# Altium PCB relay.PcbDoc (part 3 of 4)
Units mil, origin at the board's own origin, x right, y up, seen from the top; angles counter-clockwise.
Board outline 5718.69 x 3947.04 mil, 2 copper layers (Top Layer, Bottom Layer); 122 components, 108 nets, 435 pads, 81 vias.
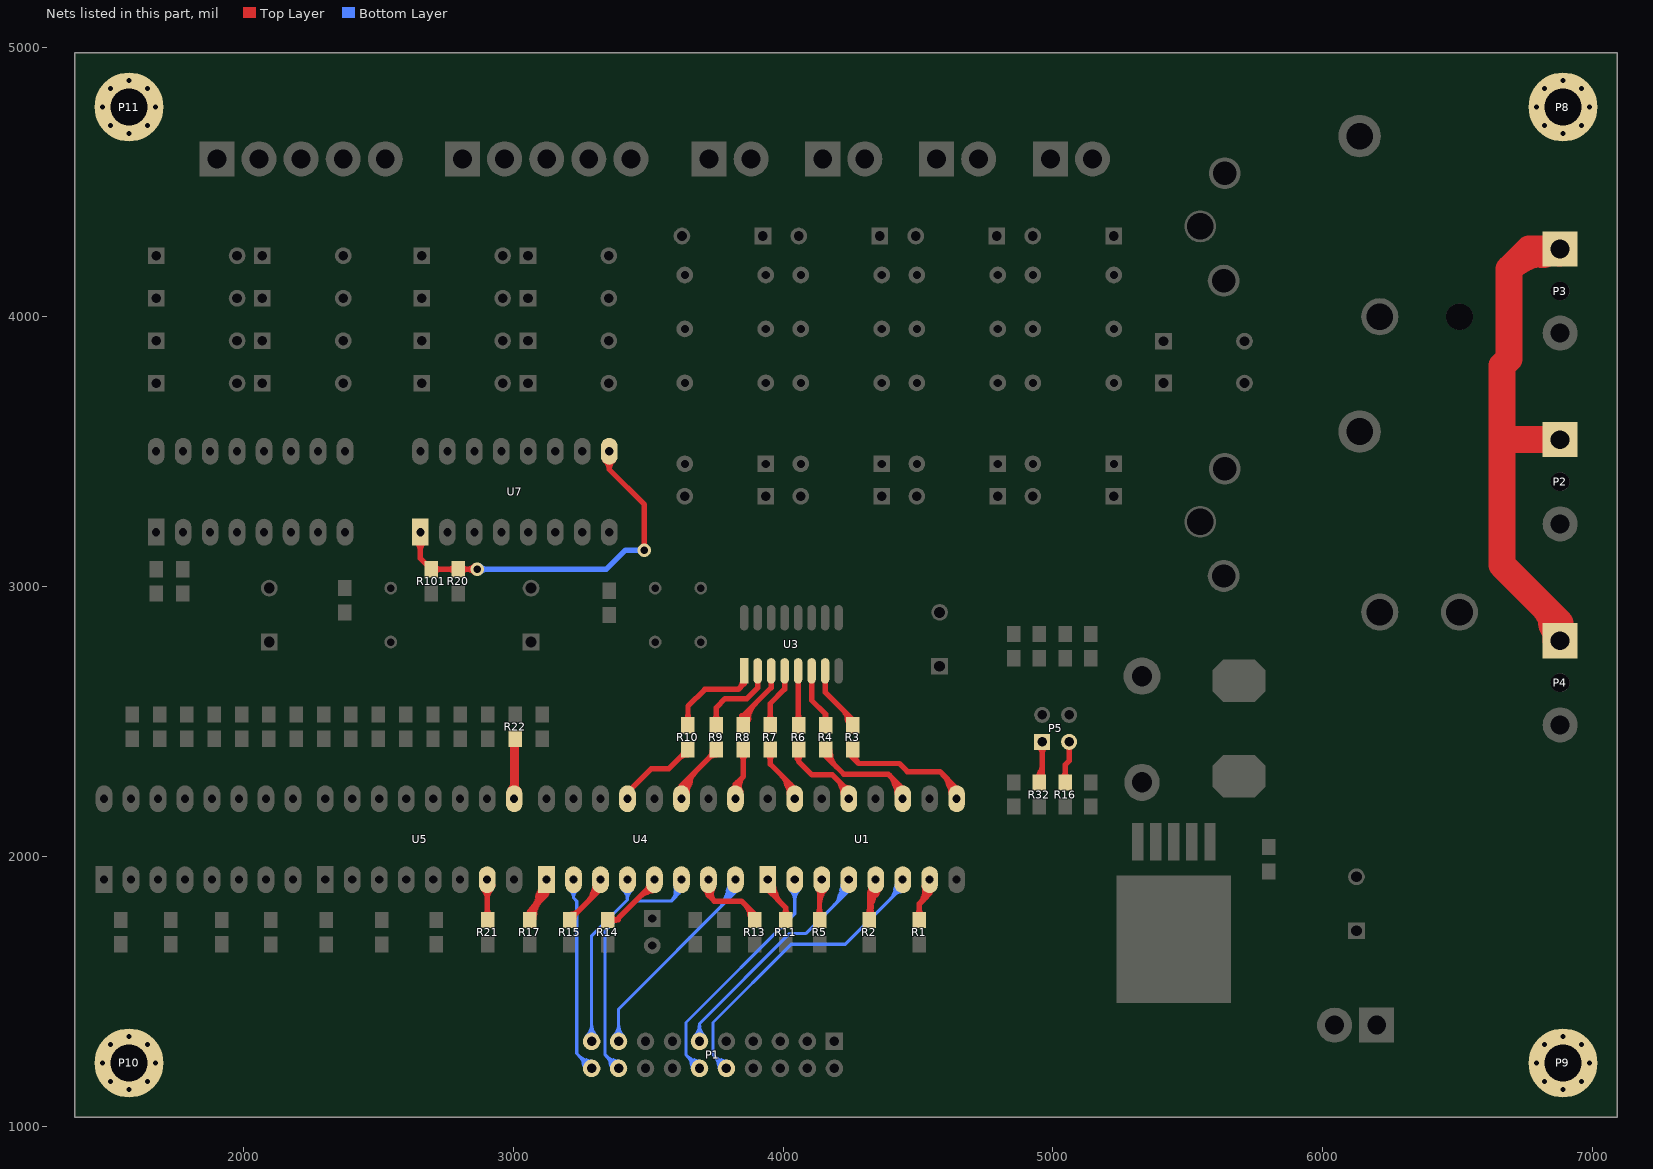
[diagram p3: the nets of this part, all layers, seen from the top]

## Via types
v1: diameter 50, hole 28, Top Layer to Bottom Layer, 42 vias
v2: diameter 50, hole 30, Top Layer to Bottom Layer, 36 vias
v3: diameter 80, hole 50, Top Layer to Bottom Layer, 2 vias
v4: diameter 100, hole 60, Top Layer to Bottom Layer, 1 vias

## Nets (pads, with @x,y where several pads share a name; then routed paths per layer and width w, separated by ;. In a path a pad name is that pad's centre, name@x,y a point inside that pad or via, vN(x,y) a via of type N, cw(c..) or ccw(c..) an arc to the next point about the centre after c; other vN are vias at no path point) (continued)
NetP1_10: P1.10 U1.6 | length 2849.5
  Bottom Layer w12: P1.10@3790,1215 3740,1265 3740,1385 4030,1675 4230,1675 4443.07,1888.07 U1.6@4443.07,1914.29 ; 3744.76,1260.24 ccw(c3790,1305.48) P1.10@3790,1241.5 ; 3744.76,1260.24 cw(c3699.52,1215) P1.10@3763.5,1215 ; 3744.76,1260.24 ccw(c3790,1305.48) P1.10@3790,1241.5 ; 3744.76,1260.24 cw(c3699.52,1215) P1.10@3763.5,1215 ; 3744.76,1260.24 ccw(c3790,1305.48) P1.10@3790,1241.5 ; 3744.76,1260.24 cw(c3699.52,1215) P1.10@3763.5,1215 ; 3752.71,1251.49 cw(c3740.19,1204.8) P1.10@3787.55,1214.5 ; 3752.71,1251.49 cw(c3740.19,1204.8) P1.10@3787.55,1214.5 ; 3752.71,1251.49 cw(c3740.19,1204.8) P1.10@3787.55,1214.5 ; 3753.51,1252.29 ccw(c3800.2,1264.81) P1.10@3790.5,1217.45 ; 3753.51,1252.29 ccw(c3800.2,1264.81) P1.10@3790.5,1217.45 ; 3753.51,1252.29 ccw(c3800.2,1264.81) P1.10@3790.5,1217.45 ; 3758.53,1233.54 ccw(c3795.84,1243.53) P1.10@3788.09,1205.69 ; 3758.53,1233.54 ccw(c3795.84,1243.53) P1.10@3788.09,1205.69 ; 3758.53,1233.54 ccw(c3795.84,1243.53) P1.10@3788.09,1205.69 ; 3765.25,1239.75 ccw(c3790,1264.51) P1.10@3790,1229.5 ; 3765.25,1239.75 cw(c3740.49,1215) P1.10@3775.5,1215 ; 3765.25,1239.75 ccw(c3790,1264.51) P1.10@3790,1229.5 ; 3765.25,1239.75 cw(c3740.49,1215) P1.10@3775.5,1215 ; 3765.25,1239.75 ccw(c3790,1264.51) P1.10@3790,1229.5 ; 3765.25,1239.75 cw(c3740.49,1215) P1.10@3775.5,1215 ; 3771.46,1246.47 cw(c3761.47,1209.16) P1.10@3799.31,1216.91 ; 3771.46,1246.47 cw(c3761.47,1209.16) P1.10@3799.31,1216.91 ; 3771.46,1246.47 cw(c3761.47,1209.16) P1.10@3799.31,1216.91 ; 4395.29,1840.29 ccw(c4340.28,1895.29) U1.6@4418.07,1895.29 ; 4395.29,1840.29 ccw(c4340.28,1895.29) U1.6@4418.07,1895.29 ; 4395.29,1840.29 ccw(c4340.28,1895.29) U1.6@4418.07,1895.29 ; 4408.02,1857.77 cw(c4458.63,1844.21) U1.6@4443.36,1894.33 ; 4408.02,1857.77 cw(c4458.63,1844.21) U1.6@4443.36,1894.33 ; 4408.02,1857.77 cw(c4458.63,1844.21) U1.6@4443.36,1894.33 ; 4412.72,1857.72 cw(c4443.07,1827.37) U1.6@4443.07,1870.29 ; 4412.72,1857.72 cw(c4443.07,1827.37) U1.6@4443.07,1870.29 ; 4412.72,1857.72 cw(c4443.07,1827.37) U1.6@4443.07,1870.29 ; 4413.61,1878.66 cw(c4451.21,1868.58) U1.6@4439.87,1905.81 ; 4413.61,1878.66 cw(c4451.21,1868.58) U1.6@4439.87,1905.81 ; 4413.61,1878.66 cw(c4451.21,1868.58) U1.6@4439.87,1905.81 ; 4415.77,1860.77 ccw(c4381.25,1895.29) U1.6@4430.07,1895.29 ; 4415.77,1860.77 ccw(c4381.25,1895.29) U1.6@4430.07,1895.29 ; 4415.77,1860.77 ccw(c4381.25,1895.29) U1.6@4430.07,1895.29
NetP1_11: P1.11 U1.4 | length 2411.1
  Bottom Layer w12: P1.11@3690,1315 3690,1380 4025,1715 4085,1715 4243.07,1873.07 U1.4@4243.07,1914.29 ; P1.11@3671.26,1333.74 ccw(c3626.02,1378.98) 3690,1378.98 ; P1.11@3671.26,1333.74 ccw(c3626.02,1378.98) 3690,1378.98 ; P1.11@3671.26,1333.74 ccw(c3626.02,1378.98) 3690,1378.98 ; P1.11@3679.75,1325.25 ccw(c3654.99,1350.01) 3690,1350.01 ; P1.11@3679.75,1325.25 ccw(c3654.99,1350.01) 3690,1350.01 ; P1.11@3679.75,1325.25 ccw(c3654.99,1350.01) 3690,1350.01 ; 3690,1350.01 ccw(c3725.01,1350.01) P1.11@3700.25,1325.25 ; 3690,1350.01 ccw(c3725.01,1350.01) P1.11@3700.25,1325.25 ; 3690,1350.01 ccw(c3725.01,1350.01) P1.11@3700.25,1325.25 ; 3690,1378.98 ccw(c3753.98,1378.98) P1.11@3708.74,1333.74 ; 3690,1378.98 ccw(c3753.98,1378.98) P1.11@3708.74,1333.74 ; 3690,1378.98 ccw(c3753.98,1378.98) P1.11@3708.74,1333.74 ; 4184.68,1814.68 ccw(c4104.07,1895.29) U1.4@4218.07,1895.29 ; 4184.68,1814.68 ccw(c4104.07,1895.29) U1.4@4218.07,1895.29 ; 4184.68,1814.68 ccw(c4104.07,1895.29) U1.4@4218.07,1895.29 ; 4205.17,1835.17 ccw(c4145.04,1895.29) U1.4@4230.07,1895.29 ; 4205.17,1835.17 ccw(c4145.04,1895.29) U1.4@4230.07,1895.29 ; 4205.17,1835.17 ccw(c4145.04,1895.29) U1.4@4230.07,1895.29 ; 4205.54,1848.51 cw(c4274.61,1830) U1.4@4243.51,1894.39 ; 4205.54,1848.51 cw(c4274.61,1830) U1.4@4243.51,1894.39 ; 4205.54,1848.51 cw(c4274.61,1830) U1.4@4243.51,1894.39 ; 4212.32,1873.81 cw(c4259.56,1861.16) U1.4@4238.29,1905.2 ; 4212.32,1873.81 cw(c4259.56,1861.16) U1.4@4238.29,1905.2 ; 4212.32,1873.81 cw(c4259.56,1861.16) U1.4@4238.29,1905.2 ; 4218.77,1853.11 cw(c4260.37,1841.96) U1.4@4247.08,1882.93 ; 4218.77,1853.11 cw(c4260.37,1841.96) U1.4@4247.08,1882.93 ; 4218.77,1853.11 cw(c4260.37,1841.96) U1.4@4247.08,1882.93 ; U1.4@4221.42,1882.79 cw(c4206.28,1874.05) 4223.17,1869.52 ; U1.4@4221.42,1882.79 cw(c4206.28,1874.05) 4223.17,1869.52 ; U1.4@4221.42,1882.79 cw(c4206.28,1874.05) 4223.17,1869.52 ; 4225.65,1855.65 ccw(c4186.01,1895.29) U1.4@4242.07,1895.29 ; 4225.65,1855.65 ccw(c4186.01,1895.29) U1.4@4242.07,1895.29 ; 4225.65,1855.65 ccw(c4186.01,1895.29) U1.4@4242.07,1895.29
NetP1_12: P1.12 U1.2 | length 2363.4
  Bottom Layer w12: P1.12@3690,1215 3640,1265 3640,1385 4043.07,1788.07 U1.2@4043.07,1914.29 ; 3644.76,1260.24 ccw(c3690,1305.48) P1.12@3690,1241.5 ; 3644.76,1260.24 cw(c3599.52,1215) P1.12@3663.5,1215 ; 3644.76,1260.24 ccw(c3690,1305.48) P1.12@3690,1241.5 ; 3644.76,1260.24 cw(c3599.52,1215) P1.12@3663.5,1215 ; 3644.76,1260.24 ccw(c3690,1305.48) P1.12@3690,1241.5 ; 3644.76,1260.24 cw(c3599.52,1215) P1.12@3663.5,1215 ; 3652.71,1251.49 cw(c3640.19,1204.8) P1.12@3687.55,1214.5 ; 3652.71,1251.49 cw(c3640.19,1204.8) P1.12@3687.55,1214.5 ; 3652.71,1251.49 cw(c3640.19,1204.8) P1.12@3687.55,1214.5 ; 3653.51,1252.29 ccw(c3700.2,1264.81) P1.12@3690.5,1217.45 ; 3653.51,1252.29 ccw(c3700.2,1264.81) P1.12@3690.5,1217.45 ; 3653.51,1252.29 ccw(c3700.2,1264.81) P1.12@3690.5,1217.45 ; 3658.53,1233.54 ccw(c3695.84,1243.53) P1.12@3688.09,1205.69 ; 3658.53,1233.54 ccw(c3695.84,1243.53) P1.12@3688.09,1205.69 ; 3658.53,1233.54 ccw(c3695.84,1243.53) P1.12@3688.09,1205.69 ; 3665.25,1239.75 ccw(c3690,1264.51) P1.12@3690,1229.5 ; 3665.25,1239.75 cw(c3640.49,1215) P1.12@3675.5,1215 ; 3665.25,1239.75 ccw(c3690,1264.51) P1.12@3690,1229.5 ; 3665.25,1239.75 cw(c3640.49,1215) P1.12@3675.5,1215 ; 3665.25,1239.75 ccw(c3690,1264.51) P1.12@3690,1229.5 ; 3665.25,1239.75 cw(c3640.49,1215) P1.12@3675.5,1215 ; 3671.46,1246.47 cw(c3661.47,1209.16) P1.12@3699.31,1216.91 ; 3671.46,1246.47 cw(c3661.47,1209.16) P1.12@3699.31,1216.91 ; 3671.46,1246.47 cw(c3661.47,1209.16) P1.12@3699.31,1216.91 ; U1.2@4025.39,1877.61 cw(c3982.72,1834.94) 4043.07,1834.94 ; U1.2@4025.39,1877.61 cw(c3982.72,1834.94) 4043.07,1834.94 ; U1.2@4025.39,1877.61 cw(c3982.72,1834.94) 4043.07,1834.94 ; U1.2@4033.88,1886.1 cw(c4011.69,1863.91) 4043.07,1863.91 ; U1.2@4033.88,1886.1 cw(c4011.69,1863.91) 4043.07,1863.91 ; U1.2@4033.88,1886.1 cw(c4011.69,1863.91) 4043.07,1863.91 ; 4043.07,1834.94 cw(c4103.43,1834.94) U1.2@4060.75,1877.61 ; 4043.07,1834.94 cw(c4103.43,1834.94) U1.2@4060.75,1877.61 ; 4043.07,1834.94 cw(c4103.43,1834.94) U1.2@4060.75,1877.61 ; 4043.07,1863.91 cw(c4074.46,1863.91) U1.2@4052.26,1886.1 ; 4043.07,1863.91 cw(c4074.46,1863.91) U1.2@4052.26,1886.1 ; 4043.07,1863.91 cw(c4074.46,1863.91) U1.2@4052.26,1886.1
NetP1_17: P1.17 U4.8 | length 2544.6
  Bottom Layer w12: P1.17@3390,1315 3390,1435 3823.07,1868.07 U4.8@3823.07,1914.29 ; P1.17@3371.26,1333.74 ccw(c3326.02,1378.98) 3390,1378.98 ; P1.17@3371.26,1333.74 ccw(c3326.02,1378.98) 3390,1378.98 ; P1.17@3371.26,1333.74 ccw(c3326.02,1378.98) 3390,1378.98 ; P1.17@3379.75,1325.25 ccw(c3354.99,1350.01) 3390,1350.01 ; P1.17@3379.75,1325.25 ccw(c3354.99,1350.01) 3390,1350.01 ; P1.17@3379.75,1325.25 ccw(c3354.99,1350.01) 3390,1350.01 ; 3390,1350.01 ccw(c3425.01,1350.01) P1.17@3400.25,1325.25 ; 3390,1350.01 ccw(c3425.01,1350.01) P1.17@3400.25,1325.25 ; 3390,1350.01 ccw(c3425.01,1350.01) P1.17@3400.25,1325.25 ; 3390,1378.98 ccw(c3453.98,1378.98) P1.17@3408.74,1333.74 ; 3390,1378.98 ccw(c3453.98,1378.98) P1.17@3408.74,1333.74 ; 3390,1378.98 ccw(c3453.98,1378.98) P1.17@3408.74,1333.74 ; 3761.15,1806.15 ccw(c3672,1895.29) U4.8@3798.07,1895.29 ; 3761.15,1806.15 ccw(c3672,1895.29) U4.8@3798.07,1895.29 ; 3761.15,1806.15 ccw(c3672,1895.29) U4.8@3798.07,1895.29 ; 3781.63,1826.63 ccw(c3712.97,1895.29) U4.8@3810.07,1895.29 ; 3781.63,1826.63 ccw(c3712.97,1895.29) U4.8@3810.07,1895.29 ; 3781.63,1826.63 ccw(c3712.97,1895.29) U4.8@3810.07,1895.29 ; 3784.71,1845.42 cw(c3860.72,1825.05) U4.8@3823.54,1894.41 ; 3784.71,1845.42 cw(c3860.72,1825.05) U4.8@3823.54,1894.41 ; 3784.71,1845.42 cw(c3860.72,1825.05) U4.8@3823.54,1894.41 ; 3791.88,1872.2 cw(c3842.75,1858.57) U4.8@3817.87,1904.99 ; 3791.88,1872.2 cw(c3842.75,1858.57) U4.8@3817.87,1904.99 ; 3791.88,1872.2 cw(c3842.75,1858.57) U4.8@3817.87,1904.99 ; 3797.67,1849 cw(c3847.17,1835.73) U4.8@3827.95,1883.24 ; 3797.67,1849 cw(c3847.17,1835.73) U4.8@3827.95,1883.24 ; 3797.67,1849 cw(c3847.17,1835.73) U4.8@3827.95,1883.24 ; U4.8@3801.42,1882.79 cw(c3786.28,1874.05) 3803.17,1869.52 ; U4.8@3801.42,1882.79 cw(c3786.28,1874.05) 3803.17,1869.52 ; U4.8@3801.42,1882.79 cw(c3786.28,1874.05) 3803.17,1869.52 ; 3802.12,1847.12 ccw(c3753.94,1895.29) U4.8@3822.07,1895.29 ; 3802.12,1847.12 ccw(c3753.94,1895.29) U4.8@3822.07,1895.29 ; 3802.12,1847.12 ccw(c3753.94,1895.29) U4.8@3822.07,1895.29 ; U4.8@3807.25,1875.94 cw(c3797.25,1863.7) 3812.51,1859.61 ; U4.8@3807.25,1875.94 cw(c3797.25,1863.7) 3812.51,1859.61 ; U4.8@3807.25,1875.94 cw(c3797.25,1863.7) 3812.51,1859.61 ; 3812.51,1859.61 cw(c3826.64,1855.83) U4.8@3825.32,1870.39 ; 3812.51,1859.61 cw(c3826.64,1855.83) U4.8@3825.32,1870.39 ; 3812.51,1859.61 cw(c3826.64,1855.83) U4.8@3825.32,1870.39
NetP1_18: P1.18 U4.6 | length 2504.4
  Bottom Layer w12: P1.18@3390,1215 3340,1265 3340,1725 3450,1835 3585,1835 ; U4.6@3623.07,1914.29 3623.07,1873.07 3585,1835 ; 3344.76,1260.24 ccw(c3390,1305.48) P1.18@3390,1241.5 ; 3344.76,1260.24 cw(c3299.52,1215) P1.18@3363.5,1215 ; 3344.76,1260.24 ccw(c3390,1305.48) P1.18@3390,1241.5 ; 3344.76,1260.24 cw(c3299.52,1215) P1.18@3363.5,1215 ; 3344.76,1260.24 ccw(c3390,1305.48) P1.18@3390,1241.5 ; 3344.76,1260.24 cw(c3299.52,1215) P1.18@3363.5,1215 ; 3352.71,1251.49 cw(c3340.19,1204.8) P1.18@3387.55,1214.5 ; 3352.71,1251.49 cw(c3340.19,1204.8) P1.18@3387.55,1214.5 ; 3352.71,1251.49 cw(c3340.19,1204.8) P1.18@3387.55,1214.5 ; 3353.51,1252.29 ccw(c3400.2,1264.81) P1.18@3390.5,1217.45 ; 3353.51,1252.29 ccw(c3400.2,1264.81) P1.18@3390.5,1217.45 ; 3353.51,1252.29 ccw(c3400.2,1264.81) P1.18@3390.5,1217.45 ; 3358.53,1233.54 ccw(c3395.84,1243.53) P1.18@3388.09,1205.69 ; 3358.53,1233.54 ccw(c3395.84,1243.53) P1.18@3388.09,1205.69 ; 3358.53,1233.54 ccw(c3395.84,1243.53) P1.18@3388.09,1205.69 ; 3365.25,1239.75 ccw(c3390,1264.51) P1.18@3390,1229.5 ; 3365.25,1239.75 cw(c3340.49,1215) P1.18@3375.5,1215 ; 3365.25,1239.75 ccw(c3390,1264.51) P1.18@3390,1229.5 ; 3365.25,1239.75 cw(c3340.49,1215) P1.18@3375.5,1215 ; 3365.25,1239.75 ccw(c3390,1264.51) P1.18@3390,1229.5 ; 3365.25,1239.75 cw(c3340.49,1215) P1.18@3375.5,1215 ; 3371.46,1246.47 cw(c3361.47,1209.16) P1.18@3399.31,1216.91 ; 3371.46,1246.47 cw(c3361.47,1209.16) P1.18@3399.31,1216.91 ; 3371.46,1246.47 cw(c3361.47,1209.16) P1.18@3399.31,1216.91 ; 3585,1835 ccw(c3546.28,1873.72) U4.6@3599,1888.53 ; 3585,1835 ccw(c3546.28,1873.72) U4.6@3599,1888.53 ; 3585,1835 ccw(c3546.28,1873.72) U4.6@3599,1888.53 ; 3599.31,1863.26 cw(c3655.19,1863.93) U4.6@3615.2,1902.98 ; 3599.31,1863.26 cw(c3655.19,1863.93) U4.6@3615.2,1902.98 ; 3599.31,1863.26 cw(c3655.19,1863.93) U4.6@3615.2,1902.98 ; 3599.5,1849.5 ccw(c3568.91,1880.08) U4.6@3610.56,1891.78 ; 3599.5,1849.5 ccw(c3568.91,1880.08) U4.6@3610.56,1891.78 ; 3599.5,1849.5 ccw(c3568.91,1880.08) U4.6@3610.56,1891.78 ; 3613.99,1863.99 ccw(c3591.55,1886.44) U4.6@3622.11,1895.02 ; 3613.99,1863.99 ccw(c3591.55,1886.44) U4.6@3622.11,1895.02 ; 3613.99,1863.99 ccw(c3591.55,1886.44) U4.6@3622.11,1895.02
NetP1_19: P1.19 U4.4 | length 1374.7
  Bottom Layer w12: P1.19@3290,1315 3290,1706.11 3423.07,1839.18 ; U4.4@3423.07,1914.29 3423.07,1839.18 ; P1.19@3271.26,1333.74 ccw(c3226.02,1378.98) 3290,1378.98 ; P1.19@3271.26,1333.74 ccw(c3226.02,1378.98) 3290,1378.98 ; P1.19@3271.26,1333.74 ccw(c3226.02,1378.98) 3290,1378.98 ; P1.19@3279.75,1325.25 ccw(c3254.99,1350.01) 3290,1350.01 ; P1.19@3279.75,1325.25 ccw(c3254.99,1350.01) 3290,1350.01 ; P1.19@3279.75,1325.25 ccw(c3254.99,1350.01) 3290,1350.01 ; 3290,1350.01 ccw(c3325.01,1350.01) P1.19@3300.25,1325.25 ; 3290,1350.01 ccw(c3325.01,1350.01) P1.19@3300.25,1325.25 ; 3290,1350.01 ccw(c3325.01,1350.01) P1.19@3300.25,1325.25 ; 3290,1378.98 ccw(c3353.98,1378.98) P1.19@3308.74,1333.74 ; 3290,1378.98 ccw(c3353.98,1378.98) P1.19@3308.74,1333.74 ; 3290,1378.98 ccw(c3353.98,1378.98) P1.19@3308.74,1333.74 ; U4.4@3406.35,1876.7 cw(c3372.62,1839.19) 3423.07,1839.19 ; U4.4@3406.35,1876.7 cw(c3372.62,1839.19) 3423.07,1839.19 ; U4.4@3406.35,1876.7 cw(c3372.62,1839.19) 3423.07,1839.19 ; 3423.07,1839.19 cw(c3473.53,1839.19) U4.4@3439.79,1876.7 ; 3423.07,1839.19 cw(c3473.53,1839.19) U4.4@3439.79,1876.7 ; 3423.07,1839.19 cw(c3473.53,1839.19) U4.4@3439.79,1876.7
NetP1_20: P1.20 U4.2 | length 1967.3
  Bottom Layer w12: U4.2@3223.07,1914.29 3223.07,1846.93 ; P1.20@3290,1215 3235,1270 3235,1835 3223.07,1846.93 ; U4.2@3208.62,1874.89 cw(c3188.8,1846.93) 3223.07,1846.93 ; U4.2@3208.62,1874.89 cw(c3188.8,1846.93) 3223.07,1846.93 ; U4.2@3208.62,1874.89 cw(c3188.8,1846.93) 3223.07,1846.93 ; 3223.07,1846.93 cw(c3257.34,1846.93) U4.2@3237.53,1874.89 ; 3223.07,1846.93 cw(c3257.34,1846.93) U4.2@3237.53,1874.89 ; 3223.07,1846.93 cw(c3257.34,1846.93) U4.2@3237.53,1874.89 ; 3244.76,1260.24 ccw(c3290,1305.48) P1.20@3290,1241.5 ; 3244.76,1260.24 cw(c3199.52,1215) P1.20@3263.5,1215 ; 3244.76,1260.24 ccw(c3290,1305.48) P1.20@3290,1241.5 ; 3244.76,1260.24 cw(c3199.52,1215) P1.20@3263.5,1215 ; 3244.76,1260.24 ccw(c3290,1305.48) P1.20@3290,1241.5 ; 3244.76,1260.24 cw(c3199.52,1215) P1.20@3263.5,1215 ; 3252.71,1251.49 cw(c3240.19,1204.8) P1.20@3287.55,1214.5 ; 3252.71,1251.49 cw(c3240.19,1204.8) P1.20@3287.55,1214.5 ; 3252.71,1251.49 cw(c3240.19,1204.8) P1.20@3287.55,1214.5 ; 3253.51,1252.29 ccw(c3300.2,1264.81) P1.20@3290.5,1217.45 ; 3253.51,1252.29 ccw(c3300.2,1264.81) P1.20@3290.5,1217.45 ; 3253.51,1252.29 ccw(c3300.2,1264.81) P1.20@3290.5,1217.45 ; 3258.53,1233.54 ccw(c3295.84,1243.53) P1.20@3288.09,1205.69 ; 3258.53,1233.54 ccw(c3295.84,1243.53) P1.20@3288.09,1205.69 ; 3258.53,1233.54 ccw(c3295.84,1243.53) P1.20@3288.09,1205.69 ; 3265.25,1239.75 ccw(c3290,1264.51) P1.20@3290,1229.5 ; 3265.25,1239.75 cw(c3240.49,1215) P1.20@3275.5,1215 ; 3265.25,1239.75 ccw(c3290,1264.51) P1.20@3290,1229.5 ; 3265.25,1239.75 cw(c3240.49,1215) P1.20@3275.5,1215 ; 3265.25,1239.75 ccw(c3290,1264.51) P1.20@3290,1229.5 ; 3265.25,1239.75 cw(c3240.49,1215) P1.20@3275.5,1215 ; 3271.46,1246.47 cw(c3261.47,1209.16) P1.20@3299.31,1216.91 ; 3271.46,1246.47 cw(c3261.47,1209.16) P1.20@3299.31,1216.91 ; 3271.46,1246.47 cw(c3261.47,1209.16) P1.20@3299.31,1216.91
NetP2_1: P2.1 P3.1 P4.1 | length 3385
  Top Layer w100: P4.1@6880,2800 6880,2865 6665,3080 6665,3545 ; P2.1@6880,3545 6665,3545 ; P3.1@6880,4252 6765,4252 6690,4177 ; 6665,3545 6665,3820 6690,3845 6690,4177 ; 6690.01,4177.01 cw(c6842.33,4024.69) P3.1@6877.55,4237.2 ; 6690.01,4177.01 cw(c6842.33,4024.69) P3.1@6877.55,4237.2 ; 6690.01,4177.01 cw(c6842.33,4024.69) P3.1@6877.55,4237.2 ; 6808.43,2936.57 cw(c6671.86,2800) P4.1@6865,2800 ; 6808.43,2936.57 cw(c6671.86,2800) P4.1@6865,2800 ; 6808.43,2936.57 cw(c6671.86,2800) P4.1@6865,2800 ; 6810.56,4230.65 ccw(c6802.21,4315.92) P3.1@6868.41,4261.52 ; 6810.56,4230.65 ccw(c6802.21,4315.92) P3.1@6868.41,4261.52 ; 6810.56,4230.65 ccw(c6802.21,4315.92) P3.1@6868.41,4261.52 ; 6847.58,2865.02 ccw(c6930.34,2887.19) P4.1@6887.5,2812.99 ; 6847.58,2865.02 ccw(c6930.34,2887.19) P4.1@6887.5,2812.99 ; 6847.58,2865.02 ccw(c6930.34,2887.19) P4.1@6887.5,2812.99
NetP5_1: P5.1 R32.2 | length 618.3
  Top Layer w20: R32.2@4950,2275 4960,2285 P5.1@4960,2425 ; R32.2@4939.39,2290.61 ccw(c4889.64,2340.36) 4960,2340.36 ; R32.2@4939.39,2290.61 ccw(c4889.64,2340.36) 4960,2340.36 ; R32.2@4939.39,2290.61 ccw(c4889.64,2340.36) 4960,2340.36 ; P5.1@4946.19,2411.19 cw(c4912.86,2377.86) 4960,2377.86 ; P5.1@4946.19,2411.19 cw(c4912.86,2377.86) 4960,2377.86 ; P5.1@4946.19,2411.19 cw(c4912.86,2377.86) 4960,2377.86 ; 4953.42,2314.9 ccw(c4968.17,2306.38) R32.2@4958.51,2292.35 ; 4953.42,2314.9 ccw(c4968.17,2306.38) R32.2@4958.51,2292.35 ; 4953.42,2314.9 ccw(c4968.17,2306.38) R32.2@4958.51,2292.35 ; 4960,2377.86 cw(c5007.14,2377.86) P5.1@4973.81,2411.19 ; 4960,2377.86 cw(c5007.14,2377.86) P5.1@4973.81,2411.19 ; 4960,2377.86 cw(c5007.14,2377.86) P5.1@4973.81,2411.19
NetP5_3: P5.3 R16.2 | length 326.9
  Top Layer w20: R16.2@5045,2275 5045,2340 5060,2355 P5.3@5060,2425 ; R16.2@5034.39,2290.61 ccw(c5008.79,2316.21) 5045,2316.21 ; R16.2@5034.39,2290.61 ccw(c5008.79,2316.21) 5045,2316.21 ; R16.2@5034.39,2290.61 ccw(c5008.79,2316.21) 5045,2316.21 ; 5045,2316.21 ccw(c5081.21,2316.21) R16.2@5055.61,2290.61 ; 5045,2316.21 ccw(c5081.21,2316.21) R16.2@5055.61,2290.61 ; 5045,2316.21 ccw(c5081.21,2316.21) R16.2@5055.61,2290.61
NetP8_1: P8.1 P8.2 P8.3 P8.4 P8.5 P8.6 P8.7 P8.8 P8.9
NetP9_1: P9.1 P9.2 P9.3 P9.4 P9.5 P9.6 P9.7 P9.8 P9.9
NetP10_1: P10.1 P10.2 P10.3 P10.4 P10.5 P10.6 P10.7 P10.8 P10.9
NetP11_1: P11.1 P11.2 P11.3 P11.4 P11.5 P11.6 P11.7 P11.8 P11.9
NetR1_1: R1.1 U1.7 | length 793.2
  Top Layer w20: R1.1@4505,1765 4505,1825 ; U1.7@4543.07,1914.29 4543.07,1863.07 ; R1.1@4494.39,1780.61 ccw(c4468.79,1806.21) 4505,1806.21 ; R1.1@4494.39,1780.61 ccw(c4468.79,1806.21) 4505,1806.21 ; R1.1@4494.39,1780.61 ccw(c4468.79,1806.21) 4505,1806.21 ; 4505,1806.21 ccw(c4541.21,1806.21) R1.1@4515.61,1780.61 ; 4505,1806.21 ccw(c4541.21,1806.21) R1.1@4515.61,1780.61 ; 4505,1806.21 ccw(c4541.21,1806.21) R1.1@4515.61,1780.61 ; 4505,1825 ccw(c4456.97,1873.04) U1.7@4522.74,1890.04 ; 4505,1825 ccw(c4456.97,1873.04) U1.7@4522.74,1890.04 ; 4505,1825 ccw(c4456.97,1873.04) U1.7@4522.74,1890.04 ; 4505,1825 4543.07,1863.07 ; 4529.75,1849.75 ccw(c4496.3,1883.2) U1.7@4542.1,1895.04 ; 4529.75,1849.75 ccw(c4496.3,1883.2) U1.7@4542.1,1895.04 ; 4529.75,1849.75 ccw(c4496.3,1883.2) U1.7@4542.1,1895.04 ; U1.7@4534.59,1876.08 cw(c4528.85,1863.07) 4543.07,1863.07 ; U1.7@4534.59,1876.08 cw(c4528.85,1863.07) 4543.07,1863.07 ; U1.7@4534.59,1876.08 cw(c4528.85,1863.07) 4543.07,1863.07 ; 4543.07,1863.07 cw(c4557.29,1863.07) U1.7@4551.55,1876.08 ; 4543.07,1863.07 cw(c4557.29,1863.07) U1.7@4551.55,1876.08 ; 4543.07,1863.07 cw(c4557.29,1863.07) U1.7@4551.55,1876.08
NetR2_1: R2.1 U1.5 | length 1579.4
  Top Layer w20: R2.1@4320,1765 4320,1866.93 ; U1.5@4343.07,1914.29 4343.07,1890 4320,1866.93 ; R2.1@4309.39,1780.61 ccw(c4283.79,1806.21) 4320,1806.21 ; R2.1@4309.39,1780.61 ccw(c4283.79,1806.21) 4320,1806.21 ; R2.1@4309.39,1780.61 ccw(c4283.79,1806.21) 4320,1806.21 ; R2.1@4312.45,1782.96 ccw(c4302.52,1800.03) R2.1@4321.61,1794.98 ; R2.1@4312.45,1782.96 ccw(c4302.52,1800.03) R2.1@4321.61,1794.98 ; R2.1@4312.45,1782.96 ccw(c4302.52,1800.03) R2.1@4321.61,1794.98 ; R2.1@4320,1788.89 cw(c4449.47,1788.89) U1.5@4357.92,1880.44 ; R2.1@4320,1788.89 cw(c4449.47,1788.89) U1.5@4357.92,1880.44 ; R2.1@4320,1788.89 cw(c4449.47,1788.89) U1.5@4357.92,1880.44 ; 4320,1806.21 ccw(c4356.21,1806.21) R2.1@4330.61,1780.61 ; 4320,1806.21 ccw(c4356.21,1806.21) R2.1@4330.61,1780.61 ; 4320,1806.21 ccw(c4356.21,1806.21) R2.1@4330.61,1780.61 ; 4320,1837.18 cw(c4401.18,1837.18) U1.5@4343.78,1894.58 ; 4320,1837.18 cw(c4401.18,1837.18) U1.5@4343.78,1894.58 ; 4320,1837.18 cw(c4401.18,1837.18) U1.5@4343.78,1894.58 ; 4320,1866.93 ccw(c4307.2,1879.73) U1.5@4323.81,1886.93 ; 4320,1866.93 cw(c4338.35,1848.58) U1.5@4340.96,1874.4 ; 4320,1866.93 ccw(c4307.2,1879.73) U1.5@4323.81,1886.93 ; 4320,1866.93 cw(c4338.35,1848.58) U1.5@4340.96,1874.4 ; 4320,1866.93 ccw(c4307.2,1879.73) U1.5@4323.81,1886.93 ; 4320,1866.93 cw(c4338.35,1848.58) U1.5@4340.96,1874.4 ; 4323.05,1858.68 ccw(c4297.4,1873.48) U1.5@4324.12,1886.24 ; 4323.05,1858.68 cw(c4351.16,1842.44) U1.5@4346.25,1874.53 ; 4323.05,1858.68 ccw(c4297.4,1873.48) U1.5@4324.12,1886.24 ; 4323.05,1858.68 cw(c4351.16,1842.44) U1.5@4346.25,1874.53 ; 4323.05,1858.68 ccw(c4297.4,1873.48) U1.5@4324.12,1886.24 ; 4323.05,1858.68 cw(c4351.16,1842.44) U1.5@4346.25,1874.53 ; U1.5@4326.62,1882.24 cw(c4291.88,1854.71) 4330.27,1832.55 ; U1.5@4326.62,1882.24 cw(c4291.88,1854.71) 4330.27,1832.55 ; U1.5@4326.62,1882.24 cw(c4291.88,1854.71) 4330.27,1832.55 ; 4327.55,1817.5 ccw(c4378.49,1804.05) R2.1@4332.96,1777.55 ; 4327.55,1817.5 ccw(c4378.49,1804.05) R2.1@4332.96,1777.55 ; 4327.55,1817.5 ccw(c4378.49,1804.05) R2.1@4332.96,1777.55 ; U1.5@4342.29,1894.67 cw(c4316.68,1874.37) 4344.98,1858.03 ; U1.5@4342.29,1894.67 cw(c4316.68,1874.37) 4344.98,1858.03 ; U1.5@4342.29,1894.67 cw(c4316.68,1874.37) 4344.98,1858.03
NetR3_1: R3.1 U1.9 | length 1261.5
  Top Layer w20: R3.1@4252.27,2396.89 R3.1@4257.27,2396.89 4257.27,2367.73 4280,2345 ; U1.9@4623.33,2240.45 ccw(c4610.73,2245.03) 4619.55,2255.12 ccw(c4629.22,2266.19) U1.9@4634.92,2252.65 ; U1.9@4643.07,2214.29 4643.07,2252.56 4580.63,2315 4460.63,2315 4430.63,2345 4280,2345 ; R3.1@4252.61,2393.7 ccw(c4276.16,2384.57) 4258.3,2366.7 ; R3.1@4252.61,2393.7 ccw(c4276.16,2384.57) 4258.3,2366.7 ; R3.1@4252.61,2393.7 ccw(c4276.16,2384.57) 4258.3,2366.7 ; R3.1@4271.25,2386.47 ccw(c4307.44,2372.45) 4280,2345 ; R3.1@4271.25,2386.47 ccw(c4307.44,2372.45) 4280,2345 ; R3.1@4271.25,2386.47 ccw(c4307.44,2372.45) 4280,2345 ; 4593.6,2302.03 cw(c4524.86,2233.29) U1.9@4622.07,2233.29 ; 4593.6,2302.03 cw(c4524.86,2233.29) U1.9@4622.07,2233.29 ; 4593.6,2302.03 cw(c4524.86,2233.29) U1.9@4622.07,2233.29 ; 4611.35,2273.3 ccw(c4670.48,2289.15) U1.9@4643.51,2234.19 ; 4611.35,2273.3 ccw(c4670.48,2289.15) U1.9@4643.51,2234.19 ; 4611.35,2273.3 ccw(c4670.48,2289.15) U1.9@4643.51,2234.19 ; 4627.74,2267.89 cw(c4593.14,2233.29) U1.9@4642.07,2233.29 ; 4627.74,2267.89 cw(c4593.14,2233.29) U1.9@4642.07,2233.29 ; 4627.74,2267.89 cw(c4593.14,2233.29) U1.9@4642.07,2233.29
NetR3_2: R3.2 U3.7 | length 504.3
  Top Layer w20: U3.7@4155.63,2688.15 4155.63,2609.37 4257.27,2507.73 R3.2@4257.27,2486.89 ; 4220.46,2544.54 cw(c4167.81,2491.89) R3.2@4242.27,2491.89 ; 4220.46,2544.54 cw(c4167.81,2491.89) R3.2@4242.27,2491.89 ; 4220.46,2544.54 cw(c4167.81,2491.89) R3.2@4242.27,2491.89 ; R3.2@4237.65,2509.13 ccw(c4271.09,2518.08) R3.2@4254.93,2487.47 ; R3.2@4237.65,2509.13 ccw(c4271.09,2518.08) R3.2@4254.93,2487.47 ; R3.2@4237.65,2509.13 ccw(c4271.09,2518.08) R3.2@4254.93,2487.47
NetR4_1: R4.1 U1.11 | length 1213.9
  Top Layer w20: R4.1@4157.27,2396.89 4157.27,2372.73 4225,2305 4390.63,2305 4443.07,2252.56 U1.11@4443.07,2214.29 ; U1.11@4423.33,2240.45 ccw(c4410.73,2245.03) 4419.55,2255.12 ccw(c4429.22,2266.19) U1.11@4434.92,2252.65 ; R4.1@4159.77,2396.22 cw(c4141.07,2363.83) R4.1@4177.19,2373.51 ; R4.1@4159.77,2396.22 cw(c4141.07,2363.83) R4.1@4177.19,2373.51 ; R4.1@4159.77,2396.22 cw(c4141.07,2363.83) R4.1@4177.19,2373.51 ; R4.1@4172.27,2391.89 ccw(c4254.73,2391.89) 4196.42,2333.58 ; R4.1@4172.27,2391.89 ccw(c4254.73,2391.89) 4196.42,2333.58 ; R4.1@4172.27,2391.89 ccw(c4254.73,2391.89) 4196.42,2333.58 ; 4393.6,2302.03 cw(c4324.86,2233.29) U1.11@4422.07,2233.29 ; 4393.6,2302.03 cw(c4324.86,2233.29) U1.11@4422.07,2233.29 ; 4393.6,2302.03 cw(c4324.86,2233.29) U1.11@4422.07,2233.29 ; 4411.35,2273.3 ccw(c4470.48,2289.15) U1.11@4443.51,2234.19 ; 4411.35,2273.3 ccw(c4470.48,2289.15) U1.11@4443.51,2234.19 ; 4411.35,2273.3 ccw(c4470.48,2289.15) U1.11@4443.51,2234.19 ; 4427.74,2267.89 cw(c4393.14,2233.29) U1.11@4442.07,2233.29 ; 4427.74,2267.89 cw(c4393.14,2233.29) U1.11@4442.07,2233.29 ; 4427.74,2267.89 cw(c4393.14,2233.29) U1.11@4442.07,2233.29
NetR4_2: R4.2 U3.6 | length 390.6
  Top Layer w20: U3.6@4105.63,2688.15 4105.63,2579.37 4157.27,2527.73 ; R4.2@4157.27,2486.89 4157.27,2527.73 ; R4.2@4146.74,2502.57 ccw(c4121.95,2527.73) 4157.27,2527.73 ; R4.2@4146.74,2502.57 ccw(c4121.95,2527.73) 4157.27,2527.73 ; R4.2@4146.74,2502.57 ccw(c4121.95,2527.73) 4157.27,2527.73 ; 4157.27,2527.73 ccw(c4192.59,2527.73) R4.2@4167.8,2502.57 ; 4157.27,2527.73 ccw(c4192.59,2527.73) R4.2@4167.8,2502.57 ; 4157.27,2527.73 ccw(c4192.59,2527.73) R4.2@4167.8,2502.57
NetR5_1: R5.1 U1.3 | length 562.2
  Top Layer w20: R5.1@4135,1765 4135,1876.93 4143.07,1885 U1.3@4143.07,1914.29 ; R5.1@4124.39,1780.61 ccw(c4098.79,1806.21) 4135,1806.21 ; R5.1@4124.39,1780.61 ccw(c4098.79,1806.21) 4135,1806.21 ; R5.1@4124.39,1780.61 ccw(c4098.79,1806.21) 4135,1806.21 ; U1.3@4128.22,1880.44 cw(c4111.86,1864.08) 4135,1864.08 ; U1.3@4128.22,1880.44 cw(c4111.86,1864.08) 4135,1864.08 ; U1.3@4128.22,1880.44 cw(c4111.86,1864.08) 4135,1864.08 ; 4135,1806.21 ccw(c4171.21,1806.21) R5.1@4145.61,1780.61 ; 4135,1806.21 ccw(c4171.21,1806.21) R5.1@4145.61,1780.61 ; 4135,1806.21 ccw(c4171.21,1806.21) R5.1@4145.61,1780.61 ; 4135,1825.11 cw(c4213.25,1825.11) U1.3@4157.92,1880.44 ; 4135,1825.11 cw(c4213.25,1825.11) U1.3@4157.92,1880.44 ; 4135,1825.11 cw(c4213.25,1825.11) U1.3@4157.92,1880.44
NetR6_1: R6.1 U1.13 | length 944.5
  Top Layer w20: 4052.27,2363.36 R6.1@4052.27,2396.89 ; R6.1@4057.27,2396.89 4057.27,2352.73 4107.19,2302.82 4182.81,2302.82 4243.07,2242.56 U1.13@4243.07,2214.29 ; R6.1@4046.66,2381.28 cw(c4021.05,2355.68) 4057.27,2355.68 ; R6.1@4046.66,2381.28 cw(c4021.05,2355.68) 4057.27,2355.68 ; R6.1@4046.66,2381.28 cw(c4021.05,2355.68) 4057.27,2355.68 ; 4052.27,2362.93 cw(c4068.24,2362.93) R6.1@4062.58,2377.86 ; 4052.27,2362.93 cw(c4068.24,2362.93) R6.1@4062.58,2377.86 ; 4052.27,2362.93 cw(c4068.24,2362.93) R6.1@4062.58,2377.86 ; 4057.27,2355.68 cw(c4093.48,2355.68) R6.1@4067.87,2381.28 ; 4057.27,2355.68 cw(c4093.48,2355.68) R6.1@4067.87,2381.28 ; 4057.27,2355.68 cw(c4093.48,2355.68) R6.1@4067.87,2381.28 ; 4200.67,2284.96 cw(c4149,2233.29) U1.13@4222.07,2233.29 ; 4200.67,2284.96 cw(c4149,2233.29) U1.13@4222.07,2233.29 ; 4200.67,2284.96 cw(c4149,2233.29) U1.13@4222.07,2233.29 ; 4213.02,2267.08 ccw(c4259.39,2279.51) U1.13@4243.4,2234.23 ; 4213.02,2267.08 ccw(c4259.39,2279.51) U1.13@4243.4,2234.23 ; 4213.02,2267.08 ccw(c4259.39,2279.51) U1.13@4243.4,2234.23 ; 4223.04,2262.59 ccw(c4243.07,2282.62) U1.13@4243.07,2254.29 ; 4223.04,2262.59 ccw(c4243.07,2282.62) U1.13@4243.07,2254.29 ; 4223.04,2262.59 ccw(c4243.07,2282.62) U1.13@4243.07,2254.29
NetR6_2: R6.2 U3.5 | length 399.1
  Top Layer w20: R6.2@4052.27,2486.89 R6.2@4052.27,2513.36 ; U3.5@4055.63,2688.15 4055.63,2488.53 R6.2@4057.27,2486.89 ; R6.2@4046.66,2502.5 ccw(c4025.01,2524.15) 4055.63,2524.15 ; R6.2@4046.66,2502.5 ccw(c4025.01,2524.15) 4055.63,2524.15 ; R6.2@4046.66,2502.5 ccw(c4025.01,2524.15) 4055.63,2524.15 ; 4055.63,2532.06 ccw(c4097.43,2532.06) R6.2@4067.87,2502.5 ; 4055.63,2532.06 ccw(c4097.43,2532.06) R6.2@4067.87,2502.5 ; 4055.63,2532.06 ccw(c4097.43,2532.06) R6.2@4067.87,2502.5
NetR7_1: R7.1 U1.15 | length 914.8
  Top Layer w20: R7.1@3952.27,2396.89 3952.27,2342.73 4043.07,2251.93 U1.15@4043.07,2214.29 ; U1.15@4023.38,2240.58 ccw(c4011.42,2245.01) 4019.74,2254.68 ccw(c4028.88,2265.27) U1.15@4034.55,2252.49 ; R7.1@3941.66,2381.28 cw(c3916.05,2355.68) 3952.27,2355.68 ; R7.1@3941.66,2381.28 cw(c3916.05,2355.68) 3952.27,2355.68 ; R7.1@3941.66,2381.28 cw(c3916.05,2355.68) 3952.27,2355.68 ; 3952.27,2355.68 cw(c3988.48,2355.68) R7.1@3962.87,2381.28 ; 3952.27,2355.68 cw(c3988.48,2355.68) R7.1@3962.87,2381.28 ; 3952.27,2355.68 cw(c3988.48,2355.68) R7.1@3962.87,2381.28 ; 3994.04,2300.96 cw(c3926.38,2233.29) U1.15@4022.07,2233.29 ; 3994.04,2300.96 cw(c3926.38,2233.29) U1.15@4022.07,2233.29 ; 3994.04,2300.96 cw(c3926.38,2233.29) U1.15@4022.07,2233.29 ; 4011.46,2272.91 ccw(c4069.73,2288.52) U1.15@4043.51,2234.19 ; 4011.46,2272.91 ccw(c4069.73,2288.52) U1.15@4043.51,2234.19 ; 4011.46,2272.91 ccw(c4069.73,2288.52) U1.15@4043.51,2234.19 ; 4028.18,2266.82 cw(c3994.66,2233.29) U1.15@4042.07,2233.29 ; 4028.18,2266.82 cw(c3994.66,2233.29) U1.15@4042.07,2233.29 ; 4028.18,2266.82 cw(c3994.66,2233.29) U1.15@4042.07,2233.29
NetR7_2: R7.2 U3.4 | length 394
  Top Layer w20: R7.2@3952.27,2486.89 3952.27,2567.27 4005.63,2620.63 U3.4@4005.63,2688.15 ; R7.2@3941.66,2502.5 ccw(c3916.05,2528.1) 3952.27,2528.1 ; R7.2@3941.66,2502.5 ccw(c3916.05,2528.1) 3952.27,2528.1 ; R7.2@3941.66,2502.5 ccw(c3916.05,2528.1) 3952.27,2528.1 ; 3952.27,2528.1 ccw(c3988.48,2528.1) R7.2@3962.87,2502.5 ; 3952.27,2528.1 ccw(c3988.48,2528.1) R7.2@3962.87,2502.5 ; 3952.27,2528.1 ccw(c3988.48,2528.1) R7.2@3962.87,2502.5
NetR8_1: R8.1 U4.9 | length 794.8
  Top Layer w20: U4.9@3823.07,2214.29 3823.07,2267.44 ; R8.1@3852.27,2396.89 3852.27,2296.64 ; U4.9@3813.6,2252.03 ccw(c3805.81,2267.44) 3823.07,2267.44 ; U4.9@3813.6,2252.03 ccw(c3805.81,2267.44) 3823.07,2267.44 ; U4.9@3813.6,2252.03 ccw(c3805.81,2267.44) 3823.07,2267.44 ; 3823.07,2267.44 ccw(c3840.34,2267.44) U4.9@3832.55,2252.03 ; 3823.07,2267.44 ccw(c3840.34,2267.44) U4.9@3832.55,2252.03 ; 3823.07,2267.44 ccw(c3840.34,2267.44) U4.9@3832.55,2252.03 ; 3823.07,2267.44 3852.27,2296.64 ; U4.9@3823.98,2233.7 cw(c3858.63,2249.28) 3831.77,2276.14 ; U4.9@3823.98,2233.7 cw(c3858.63,2249.28) 3831.77,2276.14 ; U4.9@3823.98,2233.7 cw(c3858.63,2249.28) 3831.77,2276.14 ; R8.1@3841.66,2381.28 cw(c3816.05,2355.68) 3852.27,2355.68 ; R8.1@3841.66,2381.28 cw(c3816.05,2355.68) 3852.27,2355.68 ; R8.1@3841.66,2381.28 cw(c3816.05,2355.68) 3852.27,2355.68 ; U4.9@3842.22,2241.9 cw(c3886.91,2261.99) 3852.27,2296.64 ; U4.9@3842.22,2241.9 cw(c3886.91,2261.99) 3852.27,2296.64 ; U4.9@3842.22,2241.9 cw(c3886.91,2261.99) 3852.27,2296.64 ; 3852.27,2355.68 cw(c3888.48,2355.68) R8.1@3862.87,2381.28 ; 3852.27,2355.68 cw(c3888.48,2355.68) R8.1@3862.87,2381.28 ; 3852.27,2355.68 cw(c3888.48,2355.68) R8.1@3862.87,2381.28
NetR8_2: R8.2 U3.3 | length 958.2
  Top Layer w20: R8.2@3847.27,2486.89 3847.27,2521.64 ; R8.2@3852.27,2486.89 3852.27,2522.27 ; U3.3@3955.63,2688.15 3955.63,2625.63 3852.27,2522.27 ; R8.2@3843.15,2503.8 ccw(c3829.01,2522.27) 3852.27,2522.27 ; R8.2@3843.15,2503.8 ccw(c3829.01,2522.27) 3852.27,2522.27 ; R8.2@3843.15,2503.8 ccw(c3829.01,2522.27) 3852.27,2522.27 ; R8.2@3847.27,2491.89 cw(c3908.53,2491.89) 3865.21,2535.21 ; R8.2@3847.27,2491.89 cw(c3908.53,2491.89) 3865.21,2535.21 ; R8.2@3847.27,2491.89 cw(c3908.53,2491.89) 3865.21,2535.21 ; 3847.27,2521.64 ccw(c3864.39,2521.64) R8.2@3857.93,2505.78 ; 3847.27,2521.64 ccw(c3864.39,2521.64) R8.2@3857.93,2505.78 ; 3847.27,2521.64 ccw(c3864.39,2521.64) R8.2@3857.93,2505.78 ; 3852.27,2522.27 ccw(c3875.52,2522.27) R8.2@3861.39,2503.8 ; 3852.27,2522.27 ccw(c3875.52,2522.27) R8.2@3861.39,2503.8 ; 3852.27,2522.27 ccw(c3875.52,2522.27) R8.2@3861.39,2503.8 ; R8.2@3854.77,2487.56 ccw(c3836.07,2519.95) R8.2@3872.19,2510.27 ; R8.2@3854.77,2487.56 ccw(c3836.07,2519.95) R8.2@3872.19,2510.27 ; R8.2@3854.77,2487.56 ccw(c3836.07,2519.95) R8.2@3872.19,2510.27 ; R8.2@3867.27,2491.89 cw(c3976.82,2491.89) 3899.35,2569.35 ; R8.2@3867.27,2491.89 cw(c3976.82,2491.89) 3899.35,2569.35 ; R8.2@3867.27,2491.89 cw(c3976.82,2491.89) 3899.35,2569.35
NetR9_1: R9.1 U4.11 | length 1249.6
  Top Layer w20: U4.11@3623.07,2214.29 3623.07,2263.07 3752.27,2392.27 R9.1@3752.27,2396.89 ; U4.11@3627.22,2253.88 ccw(c3631.94,2277.25) 3648.8,2260.39 ccw(c3664.18,2245.01) U4.11@3643.27,2239.05 ; R9.1@3747.27,2396.64 R9.1@3747.27,2396.89 ; U4.11@3616.61,2253.27 ccw(c3608.26,2279.08) 3634.46,2272.06 ; U4.11@3616.61,2253.27 ccw(c3608.26,2279.08) 3634.46,2272.06 ; U4.11@3616.61,2253.27 ccw(c3608.26,2279.08) 3634.46,2272.06 ; U4.11@3622.57,2234.16 ccw(c3586.74,2296.22) 3655.96,2277.68 ; U4.11@3622.57,2234.16 ccw(c3586.74,2296.22) 3655.96,2277.68 ; U4.11@3622.57,2234.16 ccw(c3586.74,2296.22) 3655.96,2277.68 ; U4.11@3624.07,2233.29 cw(c3698.38,2233.29) 3645.84,2285.84 ; U4.11@3624.07,2233.29 cw(c3698.38,2233.29) 3645.84,2285.84 ; U4.11@3624.07,2233.29 cw(c3698.38,2233.29) 3645.84,2285.84 ; 3634.46,2272.06 ccw(c3663.19,2264.36) U4.11@3639.67,2246.15 ; 3634.46,2272.06 ccw(c3663.19,2264.36) U4.11@3639.67,2246.15 ; 3634.46,2272.06 ccw(c3663.19,2264.36) U4.11@3639.67,2246.15 ; U4.11@3644.07,2233.29 cw(c3766.66,2233.29) 3679.98,2319.98 ; U4.11@3644.07,2233.29 cw(c3766.66,2233.29) 3679.98,2319.98 ; U4.11@3644.07,2233.29 cw(c3766.66,2233.29) 3679.98,2319.98 ; 3726.02,2366.02 cw(c3752.27,2339.77) R9.1@3752.27,2376.89 ; 3726.02,2366.02 cw(c3752.27,2339.77) R9.1@3752.27,2376.89 ; 3726.02,2366.02 cw(c3752.27,2339.77) R9.1@3752.27,2376.89 ; 3726.93,2366.93 ccw(c3701.97,2391.89) R9.1@3737.27,2391.89 ; 3726.93,2366.93 ccw(c3701.97,2391.89) R9.1@3737.27,2391.89 ; 3726.93,2366.93 ccw(c3701.97,2391.89) R9.1@3737.27,2391.89
NetR9_2: R9.2 U3.2 | length 487.7
  Top Layer w20: R9.2@3747.27,2486.89 R9.2@3752.27,2486.89 3752.27,2552.27 3785,2585 3865.63,2585 3905.63,2625 U3.2@3905.63,2688.15 ; R9.2@3741.66,2502.5 ccw(c3716.05,2528.1) 3752.27,2528.1 ; R9.2@3741.66,2502.5 ccw(c3716.05,2528.1) 3752.27,2528.1 ; R9.2@3741.66,2502.5 ccw(c3716.05,2528.1) 3752.27,2528.1 ; 3752.27,2528.1 ccw(c3788.48,2528.1) R9.2@3762.87,2502.5 ; 3752.27,2528.1 ccw(c3788.48,2528.1) R9.2@3762.87,2502.5 ; 3752.27,2528.1 ccw(c3788.48,2528.1) R9.2@3762.87,2502.5
NetR10_1: R10.1 U4.13 | length 484
  Top Layer w20: U4.13@3423.07,2214.29 3423.07,2237.44 3510.63,2325 3575.38,2325 R10.1@3647.27,2396.89 ; 3613.13,2362.75 cw(c3647.27,2328.61) R10.1@3647.27,2376.89 ; 3613.13,2362.75 cw(c3647.27,2328.61) R10.1@3647.27,2376.89 ; 3613.13,2362.75 cw(c3647.27,2328.61) R10.1@3647.27,2376.89 ; R10.1@3625.2,2374.82 ccw(c3608.13,2391.89) R10.1@3632.27,2391.89 ; R10.1@3625.2,2374.82 ccw(c3608.13,2391.89) R10.1@3632.27,2391.89 ; R10.1@3625.2,2374.82 ccw(c3608.13,2391.89) R10.1@3632.27,2391.89
NetR10_2: R10.2 U3.1 | length 572.5
  Top Layer w20: R10.2@3647.27,2486.89 3647.27,2557.27 3709.62,2619.62 3834.62,2619.62 ; U3.1@3849.88,2656.63 cw(c3797.79,2656.46) 3834.62,2619.62 ; U3.1@3855.63,2688.15 3855.63,2640.63 3834.62,2619.62 ; R10.2@3636.66,2502.5 ccw(c3611.05,2528.1) 3647.27,2528.1 ; R10.2@3636.66,2502.5 ccw(c3611.05,2528.1) 3647.27,2528.1 ; R10.2@3636.66,2502.5 ccw(c3611.05,2528.1) 3647.27,2528.1 ; 3647.27,2528.1 ccw(c3683.48,2528.1) R10.2@3657.87,2502.5 ; 3647.27,2528.1 ccw(c3683.48,2528.1) R10.2@3657.87,2502.5 ; 3647.27,2528.1 ccw(c3683.48,2528.1) R10.2@3657.87,2502.5
NetR11_1: R11.1 U1.1 | length 836.8
  Top Layer w20: U1.1@3943.07,1914.29 3943.07,1876.93 4010,1810 R11.1@4010,1765 ; U1.1@3942.64,1894.39 cw(c3916.74,1840.33) 3974.64,1855.84 ; U1.1@3942.64,1894.39 cw(c3916.74,1840.33) 3974.64,1855.84 ; U1.1@3942.64,1894.39 cw(c3916.74,1840.33) 3974.64,1855.84 ; U1.1@3944.07,1895.29 ccw(c3990.82,1895.29) 3957.76,1862.24 ; U1.1@3944.07,1895.29 ccw(c3990.82,1895.29) 3957.76,1862.24 ; U1.1@3944.07,1895.29 ccw(c3990.82,1895.29) 3957.76,1862.24 ; U1.1@3964.07,1895.29 ccw(c4059.1,1895.29) 3991.9,1828.1 ; U1.1@3964.07,1895.29 ccw(c4059.1,1895.29) 3991.9,1828.1 ; U1.1@3964.07,1895.29 ccw(c4059.1,1895.29) 3991.9,1828.1 ; R11.1@3999.39,1780.61 ccw(c3973.79,1806.21) 4010,1806.21 ; R11.1@3999.39,1780.61 ccw(c3973.79,1806.21) 4010,1806.21 ; R11.1@3999.39,1780.61 ccw(c3973.79,1806.21) 4010,1806.21 ; 4010,1806.21 ccw(c4046.21,1806.21) R11.1@4020.61,1780.61 ; 4010,1806.21 ccw(c4046.21,1806.21) R11.1@4020.61,1780.61 ; 4010,1806.21 ccw(c4046.21,1806.21) R11.1@4020.61,1780.61
NetR13_1: R13.1 U4.7 | length 979.7
  Top Layer w20: U4.7@3723.07,1914.29 3723.07,1856.93 ; R13.1@3895,1765 3895,1785 3845,1835 3745,1835 ; U4.7@3711.76,1877.6 cw(c3698.53,1856.93) 3723.07,1856.93 ; U4.7@3711.76,1877.6 cw(c3698.53,1856.93) 3723.07,1856.93 ; U4.7@3711.76,1877.6 cw(c3698.53,1856.93) 3723.07,1856.93 ; 3723.07,1856.93 cw(c3747.61,1856.93) U4.7@3734.39,1877.6 ; 3723.07,1856.93 cw(c3747.61,1856.93) U4.7@3734.39,1877.6 ; 3723.07,1856.93 cw(c3747.61,1856.93) U4.7@3734.39,1877.6 ; 3723.07,1856.93 3745,1835 ; U4.7@3723.9,1894.73 ccw(c3751.66,1875.83) 3727.91,1852.09 ; U4.7@3723.9,1894.73 ccw(c3751.66,1875.83) 3727.91,1852.09 ; U4.7@3723.9,1894.73 ccw(c3751.66,1875.83) 3727.91,1852.09 ; U4.7@3740.43,1883.48 ccw(c3771.99,1862) 3745,1835 ; U4.7@3740.43,1883.48 ccw(c3771.99,1862) 3745,1835 ; U4.7@3740.43,1883.48 ccw(c3771.99,1862) 3745,1835 ; 3858.79,1821.21 cw(c3807.57,1770) R13.1@3880,1770 ; 3858.79,1821.21 cw(c3807.57,1770) R13.1@3880,1770 ; 3858.79,1821.21 cw(c3807.57,1770) R13.1@3880,1770 ; R13.1@3875.47,1786.91 ccw(c3908.16,1795.67) R13.1@3892.72,1765.55 ; R13.1@3875.47,1786.91 ccw(c3908.16,1795.67) R13.1@3892.72,1765.55 ; R13.1@3875.47,1786.91 ccw(c3908.16,1795.67) R13.1@3892.72,1765.55
NetR14_1: R14.1 U4.5 | length 794.3
  Top Layer w20: R14.1@3350,1765 3390,1765 3390,1771.93 3523.07,1905 U4.5@3523.07,1914.29 ; R14.1@3360.61,1754.39 cw(c3386.21,1728.79) 3386.21,1765 ; R14.1@3360.61,1754.39 cw(c3386.21,1728.79) 3386.21,1765 ; R14.1@3360.61,1754.39 cw(c3386.21,1728.79) 3386.21,1765 ; R14.1@3360.61,1775.61 ccw(c3386.21,1801.21) 3386.21,1765 ; R14.1@3360.61,1775.61 ccw(c3386.21,1801.21) 3386.21,1765 ; R14.1@3360.61,1775.61 ccw(c3386.21,1801.21) 3386.21,1765 ; 3470.65,1852.58 cw(c3523.07,1800.15) U4.5@3523.07,1874.29 ; 3470.65,1852.58 cw(c3523.07,1800.15) U4.5@3523.07,1874.29 ; 3470.65,1852.58 cw(c3523.07,1800.15) U4.5@3523.07,1874.29 ; 3489.01,1865.16 ccw(c3476.44,1912.06) U4.5@3522.13,1895.63 ; 3489.01,1865.16 ccw(c3476.44,1912.06) U4.5@3522.13,1895.63 ; 3489.01,1865.16 ccw(c3476.44,1912.06) U4.5@3522.13,1895.63 ; 3494.09,1876.02 ccw(c3474.81,1895.29) U4.5@3502.07,1895.29 ; 3494.09,1876.02 ccw(c3474.81,1895.29) U4.5@3502.07,1895.29 ; 3494.09,1876.02 ccw(c3474.81,1895.29) U4.5@3502.07,1895.29
NetR15_1: R15.1 U4.3 | length 740.3
  Top Layer w20: R15.1@3210,1765 3210,1766.93 3323.07,1880 U4.3@3323.07,1914.29 U4.3@3335.32,1902.04 ; R15.1@3210,1785 ccw(c3210,1828.63) 3240.85,1797.78 ; R15.1@3210,1785 ccw(c3210,1828.63) 3240.85,1797.78 ; R15.1@3210,1785 ccw(c3210,1828.63) 3240.85,1797.78 ; R15.1@3225,1770 cw(c3253.8,1770) R15.1@3233.44,1790.36 ; R15.1@3225,1770 cw(c3253.8,1770) R15.1@3233.44,1790.36 ; R15.1@3225,1770 cw(c3253.8,1770) R15.1@3233.44,1790.36 ; 3276.41,1833.34 ccw(c3214.46,1895.29) U4.3@3302.07,1895.29 ; 3276.41,1833.34 ccw(c3214.46,1895.29) U4.3@3302.07,1895.29 ; 3276.41,1833.34 ccw(c3214.46,1895.29) U4.3@3302.07,1895.29 ; 3292.01,1857.76 cw(c3345.85,1843.33) U4.3@3323.47,1894.38 ; 3292.01,1857.76 cw(c3345.85,1843.33) U4.3@3323.47,1894.38 ; 3292.01,1857.76 cw(c3345.85,1843.33) U4.3@3323.47,1894.38
NetR17_1: R17.1 U4.1 | length 1780.2
  Top Layer w20: R17.1@3060,1765 3060,1796.93 ; U4.1@3110,1901.22 U4.1@3123.07,1914.29 3123.07,1860 ; R17.1@3052.1,1782.75 ccw(c3043.33,1796.93) 3060,1796.93 ; R17.1@3052.1,1782.75 ccw(c3043.33,1796.93) 3060,1796.93 ; R17.1@3052.1,1782.75 ccw(c3043.33,1796.93) 3060,1796.93 ; R17.1@3055,1770 cw(c3107.94,1770) 3070.51,1807.44 ; R17.1@3055,1770 cw(c3107.94,1770) 3070.51,1807.44 ; R17.1@3055,1770 cw(c3107.94,1770) 3070.51,1807.44 ; 3060,1796.93 ccw(c3076.67,1796.93) R17.1@3067.9,1782.75 ; 3060,1796.93 ccw(c3076.67,1796.93) R17.1@3067.9,1782.75 ; 3060,1796.93 ccw(c3076.67,1796.93) R17.1@3067.9,1782.75 ; 3060,1796.93 3123.07,1860 ; 3062.27,1799.2 ccw(c2966.17,1895.29) U4.1@3102.07,1895.29 ; 3062.27,1799.2 ccw(c2966.17,1895.29) U4.1@3102.07,1895.29 ; 3062.27,1799.2 ccw(c2966.17,1895.29) U4.1@3102.07,1895.29 ; R17.1@3062.5,1765.67 ccw(c3043.8,1798.06) R17.1@3079.92,1788.38 ; R17.1@3062.5,1765.67 ccw(c3043.8,1798.06) R17.1@3079.92,1788.38 ; R17.1@3062.5,1765.67 ccw(c3043.8,1798.06) R17.1@3079.92,1788.38 ; R17.1@3075,1770 cw(c3176.23,1770) 3104.65,1841.58 ; R17.1@3075,1770 cw(c3176.23,1770) 3104.65,1841.58 ; R17.1@3075,1770 cw(c3176.23,1770) 3104.65,1841.58 ; 3090.18,1850.91 cw(c3159.41,1832.36) U4.1@3123.57,1894.43 ; 3090.18,1850.91 cw(c3159.41,1832.36) U4.1@3123.57,1894.43 ; 3090.18,1850.91 cw(c3159.41,1832.36) U4.1@3123.57,1894.43 ; 3096.41,1833.34 ccw(c3034.46,1895.29) U4.1@3122.07,1895.29 ; 3096.41,1833.34 ccw(c3034.46,1895.29) U4.1@3122.07,1895.29 ; 3096.41,1833.34 ccw(c3034.46,1895.29) U4.1@3122.07,1895.29 ; U4.1@3105.06,1884.5 cw(c3066.62,1861.47) 3109.9,1849.87 ; U4.1@3105.06,1884.5 cw(c3066.62,1861.47) 3109.9,1849.87 ; U4.1@3105.06,1884.5 cw(c3066.62,1861.47) 3109.9,1849.87 ; 3109.9,1849.87 cw(c3149.38,1839.29) U4.1@3132,1876.28 ; 3109.9,1849.87 cw(c3149.38,1839.29) U4.1@3132,1876.28 ; 3109.9,1849.87 cw(c3149.38,1839.29) U4.1@3132,1876.28 ; U4.1@3113.05,1876.83 cw(c3103.92,1860) 3123.07,1860 ; U4.1@3113.05,1876.83 cw(c3103.92,1860) 3123.07,1860 ; U4.1@3113.05,1876.83 cw(c3103.92,1860) 3123.07,1860 ; 3123.07,1860 cw(c3142.22,1860) U4.1@3133.09,1876.83 ; 3123.07,1860 cw(c3142.22,1860) U4.1@3133.09,1876.83 ; 3123.07,1860 cw(c3142.22,1860) U4.1@3133.09,1876.83
NetR20_1: R20.1 R101.2 U7.1 U7.9 | length 2713
  Top Layer w20: U7.1@2646.95,3200.04 U7.1@2655.47,3200.04 ; U7.1@2655.47,3202.09 U7.1@2655.47,3200.04 ; v1(2865.63,3065) R20.1@2795.63,3065 R101.2@2695.63,3065 2655.47,3105.16 U7.1@2655.47,3200.04 ; U7.9@3355.47,3502.09 3355.47,3435.16 ; v1(3485.63,3135.63) 3485.63,3305 3355.47,3435.16 ; U7.1@2640.62,3168.24 cw(c2604.77,3132.39) 2655.47,3132.39 ; U7.1@2640.62,3168.24 cw(c2604.77,3132.39) 2655.47,3132.39 ; U7.1@2640.62,3168.24 cw(c2604.77,3132.39) 2655.47,3132.39 ; 2655.47,3132.39 cw(c2706.17,3132.39) U7.1@2670.32,3168.24 ; 2655.47,3132.39 cw(c2706.17,3132.39) U7.1@2670.32,3168.24 ; 2655.47,3132.39 cw(c2706.17,3132.39) U7.1@2670.32,3168.24 ; R101.2@2706.24,3054.39 cw(c2731.84,3028.79) 2731.84,3065 ; R101.2@2706.24,3054.39 cw(c2731.84,3028.79) 2731.84,3065 ; R101.2@2706.24,3054.39 cw(c2731.84,3028.79) 2731.84,3065 ; R101.2@2706.24,3075.61 ccw(c2731.84,3101.21) 2731.84,3065 ; R101.2@2706.24,3075.61 ccw(c2731.84,3101.21) 2731.84,3065 ; R101.2@2706.24,3075.61 ccw(c2731.84,3101.21) 2731.84,3065 ; 2759.42,3065 ccw(c2759.42,3101.21) R20.1@2785.02,3075.61 ; 2759.42,3065 cw(c2759.42,3028.79) R20.1@2785.02,3054.39 ; 2759.42,3065 ccw(c2759.42,3101.21) R20.1@2785.02,3075.61 ; 2759.42,3065 cw(c2759.42,3028.79) R20.1@2785.02,3054.39 ; 2759.42,3065 ccw(c2759.42,3101.21) R20.1@2785.02,3075.61 ; 2759.42,3065 cw(c2759.42,3028.79) R20.1@2785.02,3054.39 ; R20.1@2806.24,3054.39 cw(c2831.84,3028.79) 2831.84,3065 ; R20.1@2806.24,3054.39 cw(c2831.84,3028.79) 2831.84,3065 ; R20.1@2806.24,3054.39 cw(c2831.84,3028.79) 2831.84,3065 ; R20.1@2806.24,3075.61 ccw(c2831.84,3101.21) 2831.84,3065 ; R20.1@2806.24,3075.61 ccw(c2831.84,3101.21) 2831.84,3065 ; R20.1@2806.24,3075.61 ccw(c2831.84,3101.21) 2831.84,3065 ; 2829.42,3065 ccw(c2829.42,3101.21) v1@2855.02,3075.61 ; 2829.42,3065 cw(c2829.42,3028.79) v1@2855.02,3054.39 ; 2829.42,3065 ccw(c2829.42,3101.21) v1@2855.02,3075.61 ; 2829.42,3065 cw(c2829.42,3028.79) v1@2855.02,3054.39 ; 2829.42,3065 ccw(c2829.42,3101.21) v1@2855.02,3075.61 ; 2829.42,3065 cw(c2829.42,3028.79) v1@2855.02,3054.39 ; U7.9@3341.24,3467.65 cw(c3311.28,3435.16) 3355.47,3435.16 ; U7.9@3341.24,3467.65 cw(c3311.28,3435.16) 3355.47,3435.16 ; U7.9@3341.24,3467.65 cw(c3311.28,3435.16) 3355.47,3435.16 ; 3355.47,3435.16 cw(c3399.66,3435.16) U7.9@3369.71,3467.65 ; 3355.47,3435.16 cw(c3399.66,3435.16) U7.9@3369.71,3467.65 ; 3355.47,3435.16 cw(c3399.66,3435.16) U7.9@3369.71,3467.65
  Bottom Layer w20: v1(2865.63,3065) 3345,3065 3415.63,3135.63 v1(3485.63,3135.63) ; v1@2876.24,3054.39 cw(c2901.84,3028.79) 2901.84,3065 ; v1@2876.24,3054.39 cw(c2901.84,3028.79) 2901.84,3065 ; v1@2876.24,3054.39 cw(c2901.84,3028.79) 2901.84,3065 ; v1@2876.24,3075.61 ccw(c2901.84,3101.21) 2901.84,3065 ; v1@2876.24,3075.61 ccw(c2901.84,3101.21) 2901.84,3065 ; v1@2876.24,3075.61 ccw(c2901.84,3101.21) 2901.84,3065
NetR21_1: R21.1 U5.7 | length 588.8
  Top Layer w20: R21.1@2905,1765 2903.07,1766.93 U5.7@2903.07,1914.29 U5.7@2923.71,1893.65 ; U5.7@2888.22,1880.44 cw(c2852.37,1844.59) 2903.07,1844.59 ; U5.7@2888.22,1880.44 cw(c2852.37,1844.59) 2903.07,1844.59 ; U5.7@2888.22,1880.44 cw(c2852.37,1844.59) 2903.07,1844.59 ; R21.1@2894.39,1780.61 ccw(c2873.44,1801.56) 2903.07,1801.56 ; R21.1@2894.39,1780.61 ccw(c2873.44,1801.56) 2903.07,1801.56 ; R21.1@2894.39,1780.61 ccw(c2873.44,1801.56) 2903.07,1801.56 ; 2903.07,1810.87 ccw(c2945.87,1810.87) R21.1@2915.61,1780.61 ; 2903.07,1810.87 ccw(c2945.87,1810.87) R21.1@2915.61,1780.61 ; 2903.07,1810.87 ccw(c2945.87,1810.87) R21.1@2915.61,1780.61 ; 2903.07,1844.59 cw(c2953.77,1844.59) U5.7@2917.92,1880.44 ; 2903.07,1844.59 cw(c2953.77,1844.59) U5.7@2917.92,1880.44 ; 2903.07,1844.59 cw(c2953.77,1844.59) U5.7@2917.92,1880.44
NetR22_1: R22.1 U5.9 | length 864.6
  Top Layer w30: U5.9@3003.07,2214.29 3003.07,2393.61 ; U5.9@3006.35,2217.57 R22.1@3006.35,2436.89 ; U5.9@2991.76,2244.61 ccw(c2964.44,2271.92) 3003.07,2271.92 ; U5.9@2991.76,2244.61 ccw(c2956.53,2279.83) 3006.35,2279.83 ; U5.9@2991.76,2244.61 ccw(c2964.44,2271.92) 3003.07,2271.92 ; U5.9@2991.76,2244.61 ccw(c2956.53,2279.83) 3006.35,2279.83 ; U5.9@2991.76,2244.61 ccw(c2964.44,2271.92) 3003.07,2271.92 ; U5.9@2991.76,2244.61 ccw(c2956.53,2279.83) 3006.35,2279.83 ; 3003.07,2271.92 ccw(c3041.7,2271.92) U5.9@3014.38,2244.61 ; 3003.07,2271.92 ccw(c3041.7,2271.92) U5.9@3014.38,2244.61 ; 3003.07,2271.92 ccw(c3041.7,2271.92) U5.9@3014.38,2244.61 ; 3003.07,2399.83 cw(c3038.41,2399.83) R22.1@3013.42,2424.82 ; 3003.07,2399.83 cw(c3038.41,2399.83) R22.1@3013.42,2424.82 ; 3003.07,2399.83 cw(c3038.41,2399.83) R22.1@3013.42,2424.82 ; 3003.07,2399.83 cw(c3038.41,2399.83) R22.1@3013.42,2424.82 ; 3003.07,2399.83 cw(c3038.41,2399.83) R22.1@3013.42,2424.82 ; 3003.07,2399.83 cw(c3038.41,2399.83) R22.1@3013.42,2424.82